# Altium PCB PCB1.PcbDoc
Units mil, origin at the board's own origin, x right, y up, seen from the top; angles counter-clockwise.
Board outline 1280 x 655 mil, 2 copper layers (Top Layer, Bottom Layer); 9 components, 7 nets, 28 pads, 0 vias.
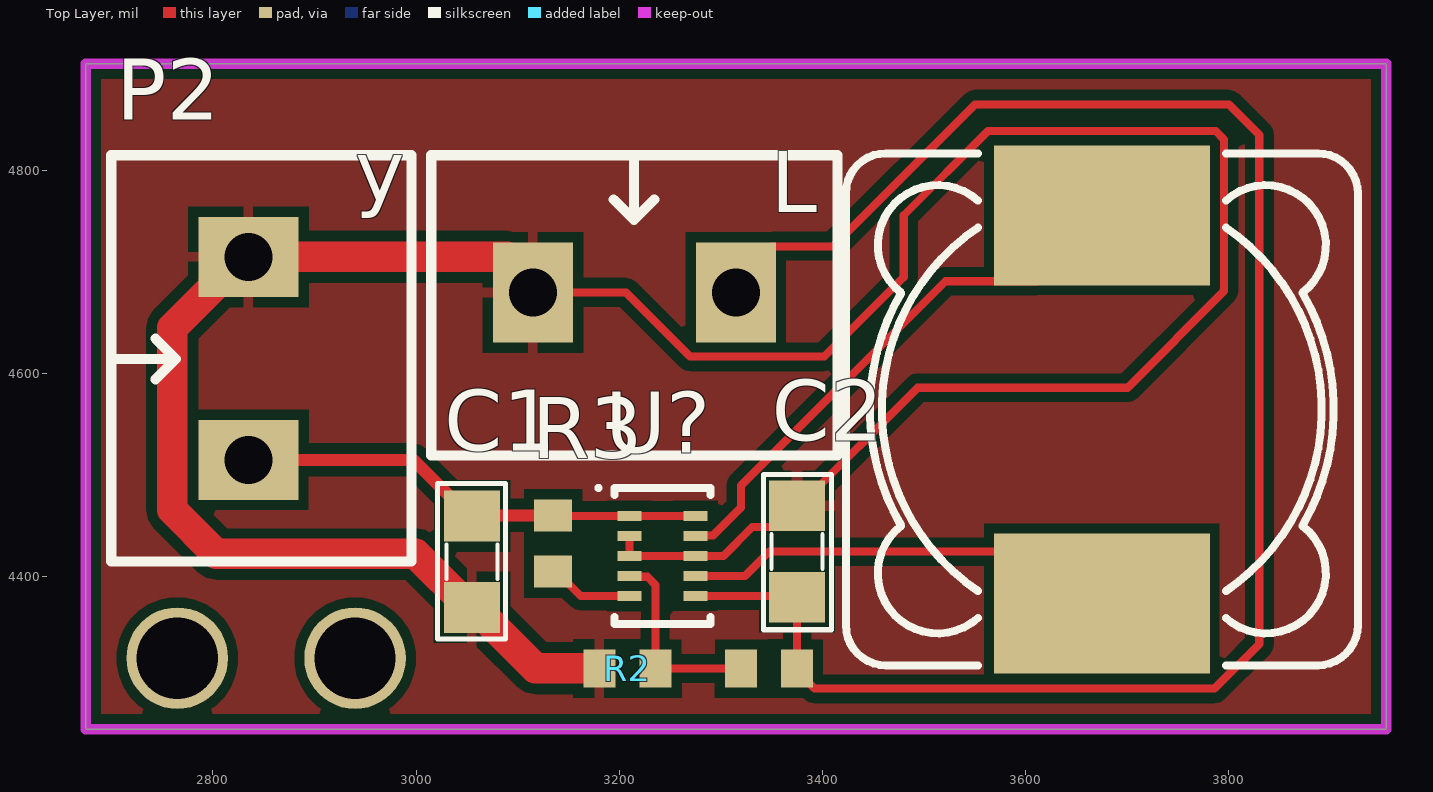
[diagram p0: Top Layer view]
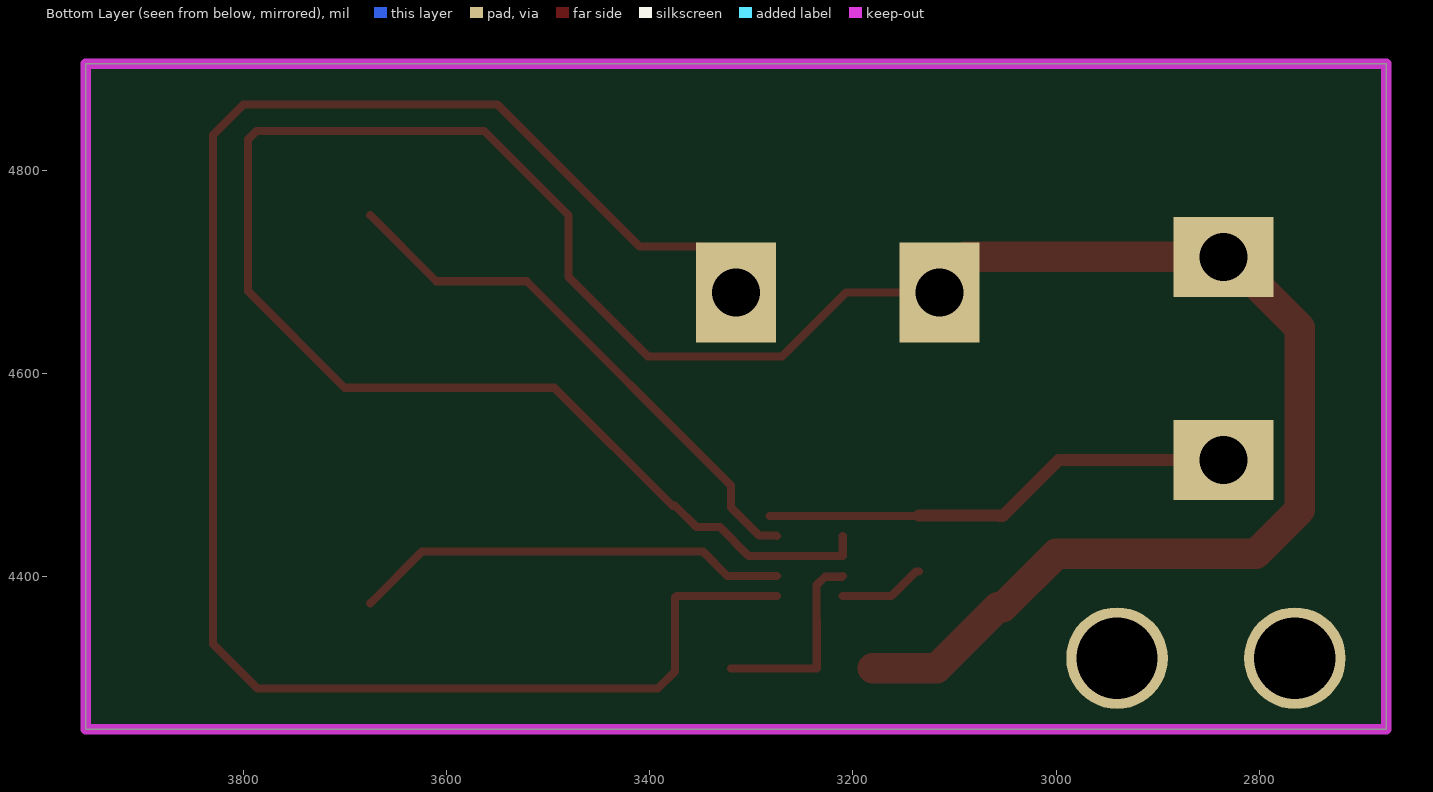
[diagram p1: Bottom Layer view, seen from below]
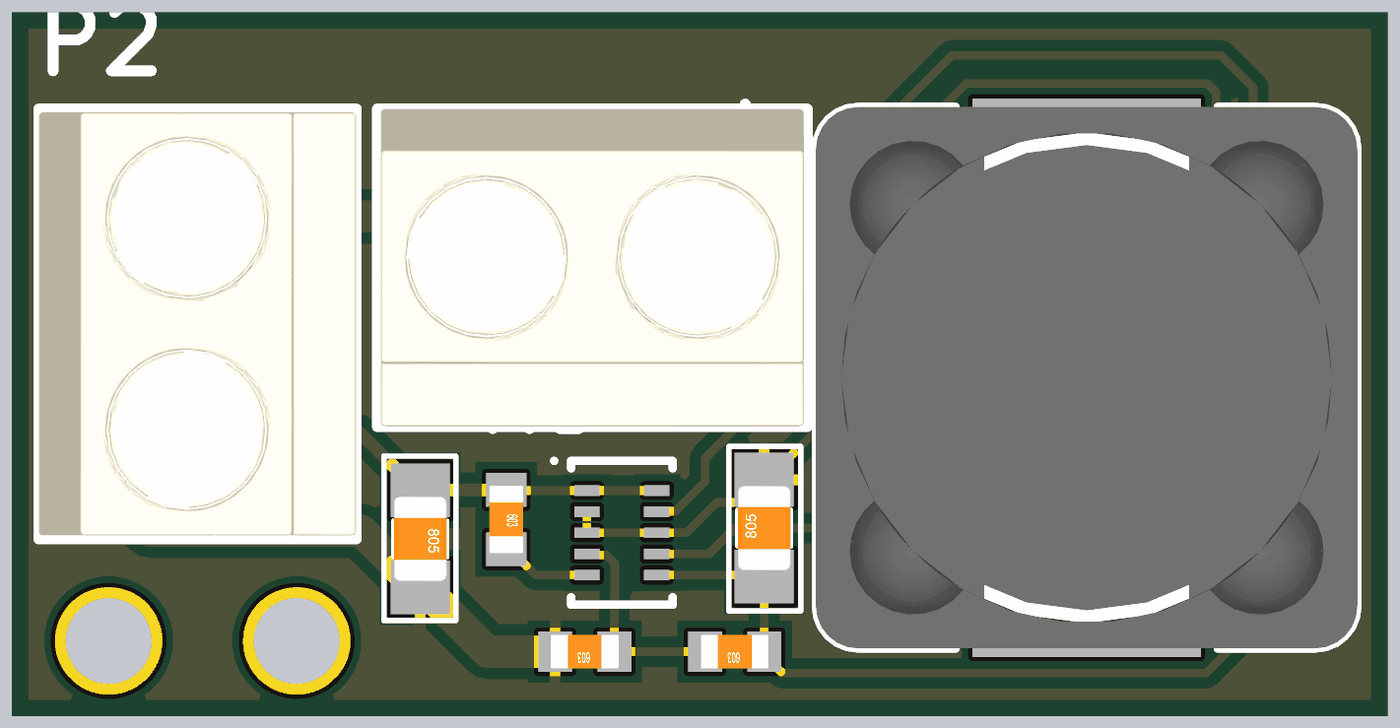
[diagram p2: 3D render of the assembled board from above, using the file's embedded part models]

## Layer stack, top to bottom
Top Solder: solder mask 0.4, Solder Resist, Dk 3.5
Top Layer: signal copper 1.4
Dielectric 1: dielectric 12.6, FR-4, Dk 4.8
Bottom Layer: signal copper 1.4
Bottom Solder: solder mask 0.4, Solder Resist, Dk 3.5

## Board outline
2675,4250 2675,4905 3955,4905 3955,4250

## Design rules (kind name [scope] priority, off if disabled: settings)
Clearance [All] p1: gap=10 ignorepadtopadclearanceinfootprint=FALSE
PolygonConnect [All] p1: connectstyle=Relief reliefconductorwidth=10 reliefentries=4 polygonreliefangle="90 Angle" airgapwidth=10
RoomDefinition Sheet1 [InComponentClass('Sheet1')] p1: confinementstyle=ConfineIn formatcopy=TRUE lockcomponents=FALSE outline 0,0 2000,0 2000,1000 0,1000
RoutingVias [All] p1: holewidth=8 width=10 viastyle="Through Hole" minholewidth=8 minwidth=10 maxholewidth=8 maxwidth=10
SolderMaskExpansion [All] p1: expansion=4 istentingtop=FALSE
Width [All] p1: maxlimit=30 minlimit=8 preferedwidth=12 minimp=50.000000 maximp=50.000000 favimp=50.000000
30 further rules are at their usual default settings.

## Classes and differential pairs
component class Sheet1: C1 C2 L P2 R3 U? y

## Components (designator, comment, footprint, x,y, rotation, side; value= is the part's Value field where it differs from the comment)
C1 "Cap Non-Pol SMD" CAP-SM-0805 3055,4460 r270 top value=10uF/6.3V
C2 "Cap Non-Pol SMD" CAP-SM-0805 3375,4380 r90 top value=44uF/6.3V
L "Inductor" "INDUCTOR 12.5x12.5" 3675,4565 r270 top value=0.47uH/5.4A
P2 "Domino 2" "DOMINO 2- 5mm" 2835,4615 r90 top
R1 "RESISTOR SMD" RES-SM-0603 3374.44,4310 r180 top value=806k
R2 "RESISTOR SMD" RES-SM-0603 3235,4310 r180 top value=91k
R3 "RESISTOR SMD" RES-SM-0603 3135,4460 r270 top value=100K
U? "TPS63802" TPS63802 3242.52,4420.63 r0 top
y "Domino 2" "DOMINO 2- 5mm" 3215,4680 r0 top

## Footprints (in the part's own frame and the unit in brackets; to place one, negate y for a bottom-side part, rotate by r counter-clockwise, add the part's x,y. Pads: shape width x height; smd on the part's side, far side on the other; paste and mask are expansions set on the pad)
CAP-SM-0805 [mil]
  rect 50x55 smd: 1(0,0) 2(90,0)
  silkscreen extent -32,-34 121,33, body extent 6,-25 84,25, height 31
"DOMINO 2- 5mm" [mm]
  rect 2x2.5 hole 1.2: 1(-2.54,0) 2(2.54,0)
  silkscreen extent -5.08,-4.08 5.08,3.43, body extent -5,-4.07 5,3.43, height 10
"INDUCTOR 12.5x12.5" [mm] "SMD Inductor  Body Width 12.5mm Body Lenght 12.5mm Height 8mm"
  rect 3.5x5.4 smd: 1(-4.85,0) 2(4.85,0)
  silkscreen extent -6.4,-6.4 6.4,6.4, body extent -6.4,-6.4 6.4,6.4, height 8
RES-SM-0603 [mm]
  rect 0.8x0.95 smd: 1(-0.014,0) 2(1.386,0)
  body extent -0.11,-0.4 1.49,0.4, height 0.3
TPS63802 [mm] "SON, 10-Leads, Body 3,00x2,00mm, Pitch 0,50mm, IPC Medium Density"
  rect 0.6x0.25 smd: 1(-0.825,1) 2(-0.825,0.5) 3(-0.825,0) 4(-0.825,-0.5) 5(-0.825,-1) 6(0.825,-1) 7(0.825,-0.5) 8(0.825,0) 9(0.825,0.5) 10(0.825,1)
  silkscreen extent -1.65,-1.7 1.2,1.75, body extent -1.05,-1.55 1.05,1.55, height 1

## Part data
C1 C2: "Capacitor"
P2 y: "Domino, 2-Pin", LatestRevisionDate=17-Jul-2002, LatestRevisionNote="Re-released for DXP Platform.", Publisher="Altium Limited"
R1 R2 R3: "Resistor"
U?: "SMD"

## Free pads (board coordinates)
  round 100 hole 80: 2(2940,4320) 3(2765,4320)

## Nets (pads, with @x,y where several pads share a name; then routed paths per layer and width w, separated by ;. In a path a pad name is that pad's centre, name@x,y a point inside that pad or via, vN(x,y) a via of type N, cw(c..) or ccw(c..) an arc to the next point about the centre after c; other vN are vias at no path point)
GND: C1.2 C2.2 P2.2 R2.2 U?.2 U?.3 U?.8 y.1 | length 2771
  Top Layer w8: y.1 3206.62,4680 3269.83,4616.79 3401.79,4616.79 3480,4695 3480,4755.94 3562.9,4838.84 3787.1,4838.84 3795.3,4830.64 3795.3,4681.25 3700.18,4586.12 3493.62,4586.12 3377.5,4470 C2.2 3354,4449 3330.96,4449 3302.59,4420.63 U?.8 U?.3 U?.2
  Top Layer w30: y.1 3115,4689.84 3089.84,4715 2825.16,4715 2800.79,4690.63 2800.79,4685.79 2760,4645 2760,4466.06 2803.42,4422.64 2999.86,4422.64 3052.5,4370 C1.2 3057.5,4370 3117.5,4310 R2.2
NetL_1: L.1 U?.9 | length 543.4
  Top Layer w8: U?.9 3275.43,4440.74 3292.27,4440.74 3320,4468.47 3320,4490 3521.05,4691.05 3610.1,4691.05 L.1
NetL_2: L.2 U?.7 | length 431.1
  Top Layer w8: U?.7 3323.65,4400.94 3347.7,4425 3624.06,4425 L.2
NetR1_2: R1.2 R2.1 U?.4 | length 195.9
  Top Layer w8: U?.4 3210.8,4400.18 3227.65,4400.18 3235.85,4391.98 3235.85,4358.49 3235.56,4358.19 R2.1 R1.2
NetR3_2: R3.2 U?.5 | length 85.1
  Top Layer w8: R3.2 3137.95,4405.44 3162.13,4381.26 U?.5
Vin: C1.1 P2.1 R3.1 U?.1 U?.10 | length 470.1
  Top Layer w8: R3.1 3135.56,4460 U?.1 U?.10 U?.10@3281.89,4460
  Top Layer w12: P2.1 2997.5,4515 3052.5,4460 C1.1 3055.56,4460.56 R3.1
Vout: C2.1 R1.1 U?.6 y.2 | length 1764.5
  Top Layer w8: U?.6 3373.74,4381.26 C2.1 3375,4307.05 3392.05,4290 3785.94,4290 3830,4334.06 3830,4835 3800,4865 3550,4865 3410.21,4725.21 3350.37,4725.21 3315,4689.84 y.2

## Polygon pours and split planes (outlines as drawn)
GND on Top Layer "GND_L01_P001" (solid, pour order 1): 2675,4905 3955,4905 3955,4250 2675,4250
no net on Top Layer "NONET_L01_P000" (solid, pour order 0): 2675,4905 3955,4905 3955,4250 2675,4250

## Keep-outs
Keep-Out Layer:
  the board outline again, w10